# Altium PCB PCB.PcbDoc (part 2 of 2)
Units mm, origin at the board's own origin, x right, y up, seen from the top; angles counter-clockwise.
Board outline 225.9 x 54.5 mm, 2 copper layers (Top Layer, Bottom Layer); 254 components, 305 nets, 976 pads, 364 vias.
Unrouted connection lines stored in the file: 1.
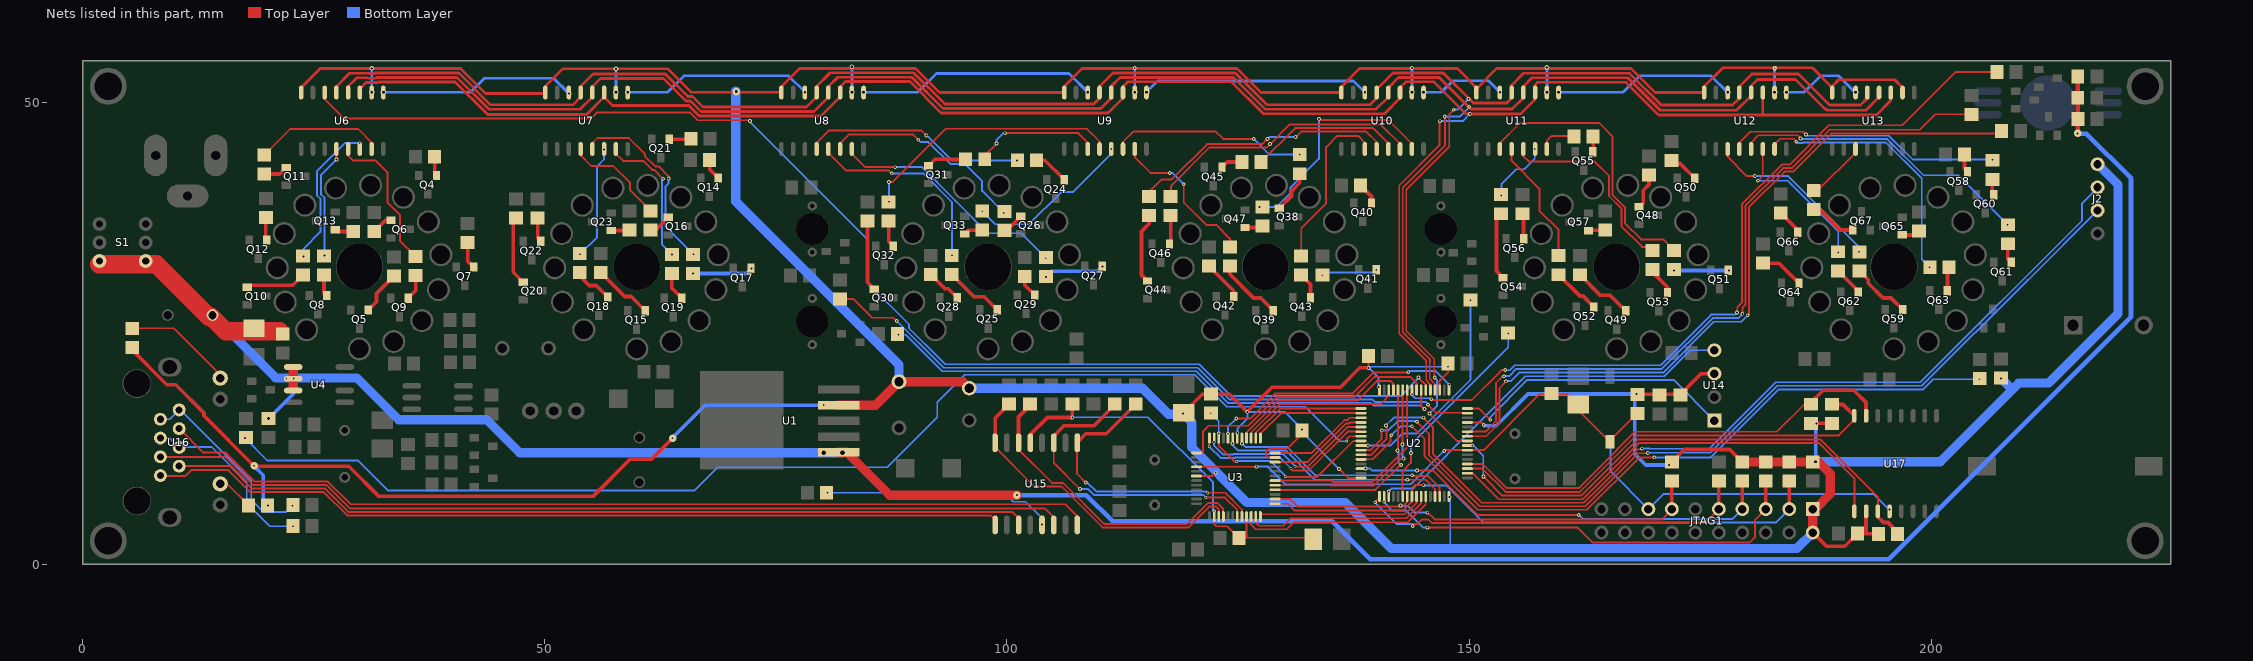
[diagram p2: the nets of this part, all layers, seen from the top]

## Via types
v1: diameter 0.4, hole 0.2, Top Layer to Bottom Layer, 274 vias
v2: diameter 0.5, hole 0.2, Top Layer to Bottom Layer, 23 vias
v3: diameter 0.6, hole 0.3, Top Layer to Bottom Layer, 22 vias
v4: diameter 0.8, hole 0.2, Top Layer to Bottom Layer, 9 vias
v5: diameter 0.5, hole 0.25, Top Layer to Bottom Layer, 9 vias
v6: diameter 0.3, hole 0.2, Top Layer to Bottom Layer, 9 vias
v7: diameter 0.6, hole 0.2, Top Layer to Bottom Layer, 5 vias
v8: diameter 0.6, hole 0.4, Top Layer to Bottom Layer, 3 vias
v9: diameter 0.8, hole 0.4, Top Layer to Bottom Layer, 3 vias
v10: diameter 0.47, hole 0.2, Top Layer to Bottom Layer, 2 vias
v11: diameter 0.8, hole 0.3, Top Layer to Bottom Layer, 2 vias
v12: diameter 0.8, hole 0.5, Top Layer to Bottom Layer, 2 vias
v13: diameter 0.5, hole 0.3, Top Layer to Bottom Layer, 1 vias

## Nets (pads, with @x,y where several pads share a name; then routed paths per layer and width w, separated by ;. In a path a pad name is that pad's centre, name@x,y a point inside that pad or via, vN(x,y) a via of type N, cw(c..) or ccw(c..) an arc to the next point about the centre after c; other vN are vias at no path point) (continued)
NetR51_2: R51.2 U9.3 | length 13.9
  Top Layer w0.2: R51.2@97.594,43.825 97.594,44.244 v1(98.875,45.525) ; v1(99.8,46.65) 107.725,46.65 108.739,45.636 U9.3@108.739,44.941
  Bottom Layer w0.2: v1@98.85,45.55 98.85,45.9 99.6,46.65 v1(99.8,46.65)
NetR52_2: R52.2 U10.3 | length 18.6
  Top Layer w0.2: R52.2@131.825,33.35 131.825,36.375 134.525,39.075 134.525,44.449 134.522,44.452 134.522,45.147 135.722,46.347 137.978,46.347 138.711,45.614 U10.3@138.711,44.941
NetR53_2: R53.2 U11.3 | length 30.9
  Top Layer w0.2: U11.3@153.316,44.941 153.316,45.566 155.497,47.747 164.053,47.747 165.5,46.3 165.5,40.009 166.85,38.659 166.85,36.9 168.6,35.15 170.975,35.15 R53.2@172.225,33.9
NetR54_2: R54.2 U12.3 | length 19.7
  Top Layer w0.2: U12.3@177.954,44.941 177.954,44.096 180.05,42 v1@180.95,42
  Bottom Layer w0.2: v1(180.9,42.025) 184.475,42.025 192.175,34.325 v1(192.175,33.825) ; v1@192.125,33.875 v1@192.175,33.925
NetR55_2: R55.2 U13.3 | length 6.6
  Top Layer w0.2: R55.2@187.275,40.469 187.719,40.469 191.797,44.547 U13.3@191.797,44.941
NetR56_2: R56.2 U6.4 | length 12.4
  Top Layer w0.2: U6.4@27.459,44.941 v1@27.475,43.775
  Bottom Layer w0.2: v1@26.15,33.425 26.15,39.689 25.775,40.064 25.775,42.1 v1@27.5,43.825
  other v1: 26.15,33.4 27.475,43.8
NetR57_2: R57.2 U7.4 | length 11.2
  Top Layer w0.2: U7.4@53.875,44.941 53.875,44.25 55.025,43.1 57.4,43.1 59.225,41.275 59.225,40.469 R57.2@61.45,38.244
NetR58_2: R58.2 U8.4 | length 24.3
  Top Layer w0.2: U8.4@79.402,44.941 79.402,45.627 80.7,46.925 90.75,46.925 v1(91.275,46.4)
  Bottom Layer w0.2: v1(91.275,46.4) 91.314,46.4 94.012,43.703 101.097,43.703 v1(101.1,43.7)
NetR59_2: R59.2 U9.4 | length 28.6
  Top Layer w0.2: v1@87.3,41.375 87.625,41.375 93.378,47.128 108.647,47.128 110.009,45.766 U9.4@110.009,44.941
  Bottom Layer w0.2: v1(87.225,39.225) v1(87.225,41.375)
NetR60_2: R60.2 U10.4 | length 29
  Top Layer w0.2: R60.2@115.375,39.794 115.375,40.3 116.725,41.65 117.825,41.65 121.65,45.475 127.625,45.475 v1(128.175,46.025) ; v1(131.225,46.225) 131.822,46.822 138.853,46.822 139.981,45.694 U10.4@139.981,44.941
  Bottom Layer w0.2: v1(128.175,46.025) 128.375,46.225 v1(131.225,46.225)
NetR61_2: R61.2 U11.4 | length 13.7
  Top Layer w0.2: U11.4@154.586,44.941 154.586,43.664 157.6,40.65 157.6,38.266 159.675,36.191 R61.2@159.675,33.394
NetR62_2: R62.2 U12.4 | length 29.8
  Top Layer w0.2: U12.4@179.224,44.941 179.224,45.624 180.397,46.797 186.103,46.797 v1@186.425,46.475
  Bottom Layer w0.2: v1(186.429,46.501) 186.429,46.446 186.497,46.378 195.401,46.378 197.979,43.8 206.55,43.8 v1@206.6,43.75
  other v1: 206.6,43.775
NetR63_2: R63.2 U6.5 | length 16.1
  Top Layer w0.2: U6.5@28.729,44.941 28.729,44.221 29.272,43.678 31.697,43.678 33,42.375 33,39.125 34.325,37.8 34.325,35.025 R63.2@36.025,33.325
NetR64_2: R64.2 U7.5 | length 20.7
  Top Layer w0.2: U7.5@55.145,44.941 55.145,45.57 55.7,46.125 59.1,46.125 60.825,44.4 60.825,44.175 61.95,43.05 62.325,43.05 63.375,42 v1@63.375,41.775
  Bottom Layer w0.2: v1(63.4,41.75) 63.4,41.25 63.075,40.925 63.075,36.55 v1(66.075,33.55)
NetR65_2: R65.2 U8.5 | length 21.7
  Top Layer w0.2: U8.5@80.672,44.941 80.672,44.528 82.6,42.6 87.225,42.6 v1(87.525,42.3)
  Bottom Layer w0.2: v1(87.525,42.3) 90.925,42.3 94.05,39.175 v1(94.05,33.45)
NetR66_2: R66.2 U9.5 | length 18.2
  Bottom Layer w0.2: v1(97.325,38.2) 98.725,36.8 102.375,36.8 105.85,40.275 107.125,40.275 111.279,44.429 v1(111.279,44.941)
NetR67_2: R67.2 U10.5 | length 16.6
  Top Layer w0.2: R67.2@127.475,43.5 131.175,47.2 139.625,47.2 141.251,45.574 U10.5@141.251,44.941
NetR68_2: R68.2 U11.5 | length 21
  Top Layer w0.2: U11.5@155.856,44.941 155.856,44.169 156.425,43.6 163.55,43.6 165.122,42.028 165.122,39.853 166.472,38.503 166.472,36.578 168.7,34.35 R68.2@169.6,34.35
NetR69_2: R69.2 U12.5 | length 32.8
  Top Layer w0.2: U12.5@180.494,44.941 180.494,45.619 181.294,46.419 185.531,46.419 v1@185.863,46.087
  Bottom Layer w0.2: v1(185.85,46.075) 185.925,46 195.245,46 199.145,42.1 202.925,42.1 v1@208.275,36.75
  other v1: 208.25,36.75
NetR70_2: R70.2 U6.6 | length 16
  Bottom Layer w0.2: v1(23.9,33.325) 23.9,34.15 25.725,35.975 25.725,39.58 25.35,39.955 25.35,42.55 28.375,45.575 v1(29.975,45.575)
NetR71_2: R71.2 U7.6 | length 12.5
  Bottom Layer w0.2: v1@53.75,33.5 55.65,35.4 55.65,43.05 56.4,43.8 v1(56.4,44.9)
  other v1: 53.8,33.55
NetR72_2: R72.2 U8.6 | length 23.5
  Top Layer w0.2: U8.6@81.942,44.358 U8.6@81.942,44.941 81.942,45.567 82.875,46.5 89.85,46.5 v1@90.425,45.925
  Bottom Layer w0.2: v1(90.4,45.925) 90.647,45.678 91.503,45.678 93.855,43.325 95.425,43.325 97.3,41.45 97.3,40.4 v1@99.675,38.025
  other v1: 99.65,38.025
NetR73_2: R73.2 U9.6 | length 21.4
  Top Layer w0.2: U9.6@112.549,44.941 112.549,45.699 113.675,46.825 122.575,46.825 123.375,46.025 v1(126.7,46.025) v1@126.725,46.025
  Bottom Layer w0.2: v1(126.7,46.025) 128.4,44.325 v1(131.675,44.325)
NetR74_2: R74.2 U10.6 | length 30.1
  Top Layer w0.2: R74.2@117.7,39.794 117.75,39.844 117.75,40.95 121.897,45.097 128.097,45.097 128.462,45.462 130.6,47.6 140.4,47.6 142.521,45.479 U10.6@142.521,44.941
  other v1: 128.45,45.475
NetR75_2: R75.2 U11.6 | length 7
  Bottom Layer w0.2: v1(153.475,39.925) 153.5,39.95 153.5,41.175 155.075,42.75 155.975,42.75 157.1,43.875 v1(157.1,44.925)
NetR76_2: R76.2 U12.6 | length 17.5
  Top Layer w0.2: v1@181.25,41.5 181.764,42.014 U12.6@181.764,44.941 U12.6@181.764,45.489
  Bottom Layer w0.2: v1(181.225,41.5) 184.466,41.5 189.925,36.041 v1(189.925,33.75)
NetR77_2: R77.2 U6.7 | length 14.2
  Top Layer w0.2: R77.2@19.95,44.05 19.95,44.6 22.45,47.1 29.8,47.1 31.269,45.631 U6.7@31.269,44.941
NetR78_2: R78.2 U7.7 | length 15.4
  Top Layer w0.2: U7.7@57.685,44.941 57.685,44.44 58.475,43.65 60.63,43.65 61.608,42.672 61.828,42.672 62.775,41.725 v1(62.8,41.725)
  Bottom Layer w0.2: v1(62.8,41.725) 62.697,41.622 62.697,34.603 v1(63.775,33.525)
NetR79_2: R79.2 U8.7 | length 26.3
  Top Layer w0.2: U8.7@83.212,44.941 83.212,44.413 84.625,43 87.925,43 v1(87.9,42.975)
  Bottom Layer w0.2: v1(87.9,42.975) 87.928,43.003 90.756,43.003 94.428,39.331 94.428,39.322 97.925,35.825 101.525,35.825 104.225,33.125 v1(104.2,33.125)
NetR80_2: R80.2 U9.7 | length 16.9
  Top Layer w0.2: U9.7@113.819,44.941 113.819,44.056 115.525,42.35 v1(117.6,42.35) v1@117.625,42.35 ; v1(119.125,41.125) 119.125,39.15 121.55,36.725 122.625,36.725 124.114,35.236 R80.2@124.114,34.335
  Bottom Layer w0.2: v1(117.6,42.35) 117.9,42.35 v1(119.125,41.125)
NetR81_2: R81.2 U10.7 | length 25
  Top Layer w0.2: v1@133.75,48.175 133.85,48.075 141.25,48.075 143.791,45.534 U10.7@143.791,44.941
  Bottom Layer w0.2: v1(127.325,38.65) 129.1,38.65 130.678,40.228 130.678,40.787 133.75,43.859 v1(133.75,48.2)
NetR82_2: R82.2 U11.7 | length 4.1
  Top Layer w0.2: U11.7@158.396,44.941 158.396,45.821 158.925,46.35 R82.2@161.375,46.35
NetR83_2: R83.2 U12.7 | length 28.5
  Top Layer w0.2: U12.7@183.034,44.941 183.034,45.434 183.642,46.042 185.108,46.042 v1@185.4,45.75
  Bottom Layer w0.2: v1(185.375,45.725) 185.503,45.597 186.048,45.597 186.073,45.622 195.088,45.622 198.95,41.761 198.95,33 v1@199.825,32.125
  other v1: 199.8,32.15
NetR90_1: R90.1 U15.13 | length 25
  Bottom Layer w0.2: v10(80.575,7.75) 99.7,7.75 100.675,6.775 102,6.775 103.8,4.975 v10(103.8,4.325)
NetR91_1: R91.1 U16.4 U16.5 | length 19.8
  Bottom Layer w0.2: U16.5@8.414,13.668 9.43,13.668 U16.4@10.446,12.652 10.398,12.7 13.95,12.7 17.75,8.9 17.75,6.625 20.25,4.125 v2(22.75,4.125)
NetR92_1: R92.1 U16.7 U16.8 | length 20.8
  Bottom Layer w0.2: U16.7@8.414,15.7 9.43,15.7 U16.8@10.446,16.716 10.584,16.716 18.25,9.05 18.25,6.975 19.575,5.65 21.975,5.65 v2@22.7,6.375
  other v2: 22.7,6.35
NetR93_1: R93.1 U16.10 | length 4
  Top Layer w0.2: U16.10@14.891,8.715 15.619,8.715 R93.1@17.959,6.375
NetR94_1: R94.1 U16.12 | length 12
  Top Layer w0.2: R94.1@5.375,25.541 9.859,25.541 14.891,20.509 U16.12@14.891,20.145
NetU15_9: U15.9 U16.1 | length 93.4
  Top Layer w0.2: U16.1@8.4,9.575 11.15,9.575 11.775,10.2 15.766,10.2 18.141,7.825 26.075,7.825 28.606,5.294 41.988,5.294 41.991,5.297 98.253,5.297 98.714,4.836 U15.9@98.714,4.222
NetU15_11: U15.11 U16.2 | length 94
  Top Layer w0.2: U16.2@10.4,10.65 15.875,10.65 18.322,8.203 26.231,8.203 28.762,5.672 41.831,5.672 41.834,5.675 100.575,5.675 101.254,4.996 U15.11@101.254,4.222
NetU15_14: U15.14 U16.3 | length 100.8
  Top Layer w0.2: U16.3@8.35,11.6 15.459,11.6 18.479,8.581 26.388,8.581 28.919,6.05 41.675,6.05 ; 41.196,6.053 104.097,6.053 105.064,5.086 U15.14@105.064,4.222
NetU15_16: U15.16 U16.6 | length 102.1
  Top Layer w0.2: U16.6@10.425,14.675 10.5,14.675 13.075,12.1 15.5,12.1 18.642,8.958 26.544,8.958 29.003,6.5 106.325,6.5 107.604,5.221 U15.16@107.604,4.222
NRES_RST#: C8.1 C9.1 JTAG1.15 R9.2 S2.2 U2.7 U3.40 U17.4 | length 92.9
  Top Layer w0.2: U3.40@120.51,10.565 v1@127.035,10.565 ; 147.4,12.45 147.3,12.35 v1(147.3,12.275) 147.384,12.359 U2.7@149.803,12.359 151.559,12.359 157.6,18.4 160.625,18.4 C8.1@161.775,17.25 ; C8.1@161.8,17.3 161.8,16.698 S2.2@165.225,13.273 ; S2.2@165.225,13.356 R9.2@168.2,16.331
  Bottom Layer w0.2: v1(127,10.575) 128.225,10.575 130.125,8.675 143.124,8.675 143.127,8.672 143.523,8.672 143.526,8.675 143.675,8.675 v1@147.275,12.275 ; 165.3,13.25 165.3,10.065 JTAG1.15@169.386,5.979 171.007,7.6 193.75,7.6 v1@195.5,5.85
  other v1: 195.475,5.925
PA1_DO1: R97.1 U2.15 | length 73
  Top Layer w0.2: R97.1@81.95,28.719 83.356,28.719 85.4,26.675 87.7,26.675 v1@88.05,26.325 ; v1@145.538,17.287 146.425,16.4 149.762,16.4 U2.15@149.803,16.359
  Bottom Layer w0.2: v1@88.1,26.325 92.671,21.754 92.68,21.754 93.162,21.272 120.644,21.272 124.094,17.822 139.553,17.822 139.8,17.575 145.325,17.575 145.55,17.35 v1(145.55,17.275)
  other v1: 88.075,26.325
PA2_SHT_DAT: U2.16 U14.1 | length 31
  Top Layer w0.2: U2.16@149.803,16.859 151.066,16.859 v1(152.275,15.65)
  Bottom Layer w0.2: v1(152.275,15.65) 152.275,15.941 156.284,19.95 172.125,19.95 U14.1@176.525,15.55
PA3_CMD#: U2.17 U3.32 | length 28.3
  Top Layer w0.2: v1@124.825,15.775 126.3,15.775 129.025,18.5 137.4,18.5 139.675,20.775 v1@143.375,20.775 ; U2.17@147.803,18.859 v1@147.803,19.497
  Bottom Layer w0.2: v1(123.9,14.125) 123.9,14.875 v1(124.8,15.775) ; v1@143.425,20.825 143.525,20.925 146.339,20.925 147.789,19.475 v1@147.825,19.475
  other v1: 147.852,19.449 143.4,20.8
PA4_ST: U2.20 U6.12 U7.12 U8.12 U9.12 U10.12 U11.12 U12.12 U13.12 | length 226.4
  Top Layer w0.2: U2.20@146.303,18.859 146.303,19.483 145.728,20.058 145.728,21.869 145.769,21.91 145.769,22.14 142.816,25.093 142.816,40.741 147.375,45.3 147.375,48.425 v1@147.4,48.45 ; v1(147.352,48.451) v1@147.399,48.451
  Top Layer w0.3: U6.12@28.729,51.041 28.729,51.698 29.681,52.65 30.782,52.65 30.836,52.597 31.706,52.597 31.708,52.594 31.712,52.594 31.796,52.678 40.502,52.678 43.945,49.235 53.825,49.235 55.145,50.555 U7.12@55.145,51.041 55.145,51.695 56.022,52.572 57.26,52.572 57.263,52.569 62.273,52.569 62.275,52.572 62.832,52.572 65.277,50.128 65.773,50.128 66.906,48.994 79.119,48.994 80.672,50.547 U8.12@80.672,51.041 80.672,51.687 81.688,52.703 89.696,52.703 93.076,49.322 110.147,49.322 111.279,50.454 U9.12@111.279,51.041 111.279,51.729 112.228,52.678 124.496,52.678 127.929,49.244 139.919,49.244 141.251,50.576 U10.12@141.251,51.041 141.251,51.56 142.369,52.678 146.763,52.678 150.166,49.275 154.65,49.275 155.856,50.481 155.856,51.698 156.808,52.65 ; 156.8,52.647 167.151,52.647 170.674,49.125 178.937,49.125 180.494,50.682 U12.12@180.494,51.041 180.494,51.736 181.208,52.45 185.3,52.45 188.475,49.275 188.625,49.275 ; 188.629,49.275 188.781,49.122 192.904,49.122 194.337,50.555 U13.12@194.337,51.041
  Bottom Layer w0.2: v1(147.352,48.451) 148.975,48.45 150,49.475 v1@150,49.525
  other v1: 150,49.5
PA5_SH: U2.21 U6.11 U7.11 U8.11 U9.11 U10.11 U11.11 U12.11 U13.11 | length 225.3
  Top Layer w0.2: U2.21@145.803,18.859 145.803,19.448 145.35,19.902 145.35,22.025 142.438,24.937 142.438,40.988 146.775,45.325 146.775,47.75 v1@146.925,47.9
  Top Layer w0.3: U6.11@29.999,51.441 30.677,52.119 31.508,52.119 31.511,52.117 31.91,52.117 31.966,52.172 40.276,52.172 40.304,52.2 43.829,48.675 54.535,48.675 56.415,50.555 U7.11@56.415,51.041 56.425,51.051 U7.11@56.425,51.7 ; U7.11@56.4,50.575 57.325,49.65 65.575,49.65 66.708,48.517 79.892,48.517 81.942,50.567 U8.11@81.942,51.041 81.942,51.617 82.55,52.225 89.498,52.225 92.878,48.844 110.919,48.844 112.549,50.474 U9.11@112.549,51.041 112.549,51.687 113.062,52.2 ; 113.05,52.2 124.298,52.2 127.748,48.75 140.825,48.75 142.521,50.446 U10.11@142.521,51.041 142.521,51.571 143.15,52.2 146.2,52.2 149.675,48.725 v1(150.075,48.725) 155.55,48.725 157.134,50.309 U11.11@157.134,50.944 ; U11.11@157.126,51.041 157.126,51.872 157.404,52.15 166.973,52.15 170.498,48.625 194.058,48.625 195.607,50.174 U13.11@195.607,51.041 ; 181.725,48.6 181.75,48.625 ; 181.764,48.625 U12.11@181.764,51.041 U12.11@181.764,51.667
  Top Layer w0.4: U6.11@29.999,51.041 U6.11@29.999,51.441
  Bottom Layer w0.2: v1(146.85,47.95) 149.3,47.95 v1(150.075,48.725)
PA6_MO: U2.22 U6.14 | length 138.6
  Top Layer w0.2: U6.14@26.189,51.041 26.189,50.336 28.3,48.225 54.95,48.225 55.6,48.875 65.745,48.875 66.57,48.05 72.124,48.05 v1(72.198,47.976) ; v1(144.525,20.225) 144.525,20.15 144.938,19.737 144.98,19.737 145.303,19.414 U2.22@145.303,18.859
  Bottom Layer w0.2: v1(72.198,47.976) v1@72.2,47.978 ; v1(72.198,47.976) 72.15,47.924 72.15,47.9 84.95,35.1 84.95,30.425 89.4,25.975 89.4,25.559 92.827,22.132 92.837,22.132 93.319,21.65 120.8,21.65 124.25,18.2 142.575,18.2 144.5,20.125 144.5,20.2 v1(144.525,20.225)
PA7_DO2: R98.1 U2.23 | length 62.5
  Top Layer w0.2: U2.23@144.803,18.859 144.803,17.122 145.125,16.8 v1@145.15,16.8
  Bottom Layer w0.2: v1(88.25,24.85) 89.041,24.85 92.514,21.376 92.524,21.376 93.006,20.894 120.487,20.894 123.937,17.444 139.396,17.444 139.666,17.175 144.8,17.175 v1(145.175,16.8)
PA8_DO3: R99.1 U2.41 | length 23.5
  Top Layer w0.2: U2.41@138.303,12.859 v1@139.025,12.85
  Bottom Layer w0.2: v1(139.039,12.862) 139.012,12.862 139,12.85 141.475,12.85 142.775,14.15 144.3,14.15 150.15,20 v1(150.15,28.575)
PA9_TXD: J2.3 U2.42 | length 100.2
  Top Layer w0.2: U2.42@138.303,12.359 139.309,12.359 140.525,13.575 140.525,14.4 v1@140.625,14.5 ; v1(144.35,15.425) 145.652,14.123 145.652,11.803 151.166,6.289 162.573,6.289 168.309,12.025 v1@169.35,12.025
  Bottom Layer w0.2: v1(140.55,14.5) 141.25,14.5 142.25,15.5 144.275,15.5 v1(144.35,15.425) v1@144.375,15.425 ; v1(169.325,12.05) 169.25,12.075 176.1,12.075 183.347,19.322 198.972,19.322 210.4,30.75 210.45,30.75 J2.3@218,38.3
PA10_RXD: J2.2 U2.43 | length 103.1
  Top Layer w0.2: U2.43@138.303,11.859 138.333,11.829 139.349,11.829 141.05,13.53 141.05,14.9 v1@140.975,14.975 ; v1(145.05,15.875) 146.075,14.85 146.075,11.953 151.361,6.667 162.417,6.667 164.225,8.475 168.2,12.45 v1@168.675,12.45
  Bottom Layer w0.2: v1(141,15.025) 141.878,15.903 145.022,15.903 v1(145.05,15.875) ; v1(168.678,12.524) 168.678,12.478 168.728,12.528 169.523,12.528 169.548,12.502 175.952,12.502 183.158,19.708 198.808,19.708 216.3,37.2 216.3,39.05 217.975,40.725 J2.2@217.975,40.775
PA11_BEEZ: R89.2 U2.44 | length 79.3
  Top Layer w0.2: U2.44@138.3,11.375 139.55,11.375 141.5,13.325 v1@141.5,13.925 ; v1(143.8,14.95) 145.183,13.567 145.183,11.677 150.948,5.911 162.736,5.911 168.375,11.55 169.9,11.55 169.925,11.525 v1@169.975,11.575
  Bottom Layer w0.2: v1@141.575,13.95 142.575,14.95 v1(143.8,14.95) ; v1(170.025,11.575) 176.15,11.575 183.5,18.925 199.125,18.925 200.225,20.025 v1(205.175,20.025)
  other v1: 141.576,13.963
PA13_JTMS: JTAG1.7 R102.2 U2.46 | length 46.5
  Top Layer w0.2: v1(144.35,10.15) 146.125,10.15 150.95,5.325 v1@161.875,5.325
  Top Layer w0.4: JTAG1.7@179.546,5.979 R102.2@179.546,8.999
  Bottom Layer w0.2: v1(138.775,10.375) 139.275,10.375 139.475,10.175 144.3,10.175 v1@144.35,10.125 ; v1(161.85,5.35) 162.272,4.928 178.495,4.928 JTAG1.7@179.546,5.979
PA14_JTCK: JTAG1.9 R110.2 U2.49 | length 43.3
  Top Layer w0.2: v1(139.825,6.725) 140.303,7.203 U2.49@140.303,7.359 ; v1(143.887,4.158) 143.887,4.238 143.75,4.375 144.4,4.375 144.875,4.85 145.6,4.85 145.956,4.494 175.521,4.494 JTAG1.9@177.006,5.979
  Top Layer w0.4: JTAG1.9@177.006,5.979 R110.2@177.006,8.999
  Bottom Layer w0.2: v1(139.825,6.725) 139.825,6.675 142.125,4.375 143.775,4.375
PA15_JTDI: JTAG1.5 R103.2 U2.50 | length 48.8
  Top Layer w0.2: v1(145.5,3.975) 161.75,3.975 163.375,2.35 180.325,2.35 180.9,2.925 180.9,4.793 JTAG1.5@182.086,5.979
  Top Layer w0.4: JTAG1.5@182.086,5.979 R103.2@182.086,8.999
  Bottom Layer w0.2: v1(140.8,6.775) 140.8,6.725 141.7,5.825 143.175,5.825 145.025,3.975 v1(145.5,3.975)
PB_SD0: U2.26 U3.18 | length 22
  Top Layer w0.2: U3.18@129.01,9.065 135.132,9.065 135.297,8.9 139.501,8.9 143.291,12.69 U2.26@143.291,18.813
PB_SD1: U2.27 U3.17 | length 22.6
  Top Layer w0.2: U3.17@129.01,8.565 134.997,8.565 135.04,8.522 139.672,8.522 142.6,11.45 v1@142.9,11.45 ; v1(142.783,12.971) 142.803,12.951 U2.27@142.803,18.859
  Bottom Layer w0.2: v1(142.783,12.971) 142.783,11.574 v1(142.91,11.447)
PB_SD2: U2.28 U3.16 | length 23.1
  Top Layer w0.2: U3.16@129.01,8.065 139.862,8.065 142.572,10.775 v1@142.675,10.775 ; v1@142.303,12.336 U2.28@142.303,18.859
  Bottom Layer w0.2: v1@142.148,12.336 142.35,12.134 142.35,11.025 v1@142.625,10.75
  other v1: 142.65,10.75 142.25,12.325
PB_SD3: JTAG1.13 R101.1 U2.55 U3.14 | length 49
  Top Layer w0.2: U3.14@129.01,7.065 130.655,7.065 131.473,6.247 142.75,6.247 143.303,6.8 U2.55@143.303,7.359 ; v1@145.475,5.65 146.253,4.872 170.897,4.872 171.926,5.901 JTAG1.13@171.926,5.979
  Top Layer w0.4: JTAG1.13@171.926,5.979 R101.1@171.926,9.027
  Bottom Layer w0.2: v1@142.55,6.325 143.375,6.325 144.075,5.625 145.5,5.625 v1@145.5,5.65
  other v1: 145.475,5.6 142.575,6.375
PB_SD4: JTAG1.3 R104.1 U2.56 U3.13 | length 63.2
  Top Layer w0.2: U3.13@129.01,6.565 130.356,6.565 131.086,5.835 142.886,5.835 143.803,6.752 U2.56@143.803,7.359 143.803,8.253 144.125,8.575 v1@144.975,8.575
  Top Layer w0.4: JTAG1.3@184.626,5.979 R104.1@184.626,9.027
  Bottom Layer w0.2: v1@145.05,8.55 147.525,8.55 151.525,4.55 183.197,4.55 JTAG1.3@184.626,5.979
  other v1: 145.075,8.575
PB_SD5: U2.57 U3.12 | length 18.4
  Top Layer w0.2: U3.12@127.41,5.165 127.41,5.428 143.049,5.428 144.303,6.683 U2.57@144.303,7.359
PB_SD6: U2.58 U3.11 | length 20.4
  Top Layer w0.2: U3.11@126.91,5.165 126.91,4.498 127.234,4.175 129.883,4.175 130.705,4.997 143.176,4.997 144.803,6.624 U2.58@144.803,7.359
PB_SD7: U2.59 U3.10 | length 21.9
  Top Layer w0.2: U3.10@126.41,5.165 126.41,4.287 126.9,3.797 130.242,3.797 131.01,4.565 143.354,4.565 145.303,6.514 U2.59@145.303,7.359
PB_SD8: U2.61 U3.31 | length 24.9
  Top Layer w0.2: v1@143.275,9.175 143.3,9.15 145.296,9.15 146.303,8.143 U2.61@146.303,7.359
  Bottom Layer w0.2: v1@124.425,13.05 124.425,12.875 124.967,12.333 130.132,12.333 133.316,9.15 v1(143.325,9.15)
  other v1: 124.4,13.075
PB_SD9: U2.62 U3.29 | length 24.3
  Top Layer w0.2: v1@143.825,9.575 145.525,9.575 146.8,8.3 146.8,7.362 U2.62@146.803,7.359
  Bottom Layer w0.2: v1@125.4,13.1 125.789,12.711 130.289,12.711 133.35,9.65 v1(143.825,9.65)
  other v1: 125.425,13.075
PB_SD10: U2.29 U3.28 | length 19.3
  Top Layer w0.2: U3.28@125.925,13.925 125.925,14.303 129.347,17.725 137.875,17.725 139.979,19.829 141.496,19.829 141.803,19.522 U2.29@141.803,18.859
PB_SD11: U2.30 U3.27 | length 17.6
  Top Layer w0.2: U3.27@126.425,13.775 126.425,14.269 129.504,17.347 140.428,17.347 141.303,18.222 U2.30@141.303,18.859
PB_SD12: U2.33 U3.26 | length 12.8
  Top Layer w0.2: U3.26@126.925,13.9 126.925,14.235 129.55,16.859 U2.33@138.303,16.859
PB_SD13: U2.34 U3.25 | length 12.3
  Top Layer w0.2: U3.25@127.41,13.665 127.41,14.11 129.659,16.359 U2.34@138.303,16.359
PB_SD14: U2.35 U3.24 | length 10.9
  Top Layer w0.2: U3.24@129.01,12.065 132.962,12.065 136.512,15.615 136.8,15.615 137.045,15.859 U2.35@138.303,15.859
PB_SD15: U2.36 U3.22 | length 11.1
  Top Layer w0.2: U3.22@129.01,11.065 132.496,11.065 136.668,15.237 136.957,15.237 137.079,15.359 U2.36@138.303,15.359
PC0_CLK_INT: R107.1 U2.8 U17.3 | length 58
  Top Layer w0.2: v1@151.5,9.325 151.725,9.325 153.6,7.45 162.131,7.45 168.181,13.5 188.009,13.5 194.207,7.302 U17.3@194.207,5.739
  Top Layer w0.4: U17.3@194.207,5.739 194.207,5.143 194.825,4.525 195.3,4.525 196.316,3.509 R107.1@196.316,3.3
  Bottom Layer w0.2: v1(150.325,12.875) 150.425,12.875 151.525,11.775 151.525,9.325 151.55,9.35 v1(151.55,9.5)
PC1_OE: U2.9 U6.13 U7.13 U8.13 U9.13 U10.13 U11.13 U12.13 U13.13 | length 234.5
  Top Layer w0.2: v1@145.725,16.3 148.666,13.359 U2.9@149.803,13.359 ; v1(146.277,20.224) 146.227,20.224 146.225,20.226 146.225,22.219 143.194,25.25 143.194,40.519 147.85,45.175 147.85,48.675 v1@148.35,49.175
  Top Layer w0.3: U6.13@27.459,51.041 27.459,51.698 28.889,53.128 30.98,53.128 31.033,53.074 31.517,53.074 31.598,53.156 40.7,53.156 44.142,49.713 53.033,49.713 53.875,50.555 U7.13@53.875,51.041 53.875,51.698 55.227,53.05 57.458,53.05 57.461,53.047 62.075,53.047 62.077,53.05 63.03,53.05 65.475,50.606 65.971,50.606 67.104,49.472 78.319,49.472 79.402,50.555 U8.13@79.402,51.041 79.402,51.698 80.885,53.181 89.894,53.181 93.274,49.8 109.381,49.8 110.009,50.428 U9.13@110.009,51.041 110.009,51.698 111.467,53.156 124.694,53.156 128.127,49.722 139.275,49.722 139.981,50.428 U10.13@139.981,51.041 139.981,51.375 141.762,53.156 147.194,53.156 150.45,49.9 154.058,49.9 154.586,50.428 U11.13@154.586,51.041 154.586,51.825 155.889,53.128 158.7,53.128 ; 158.692,53.125 167.349,53.125 170.772,49.702 178.498,49.702 179.224,50.428 U12.13@179.224,51.041 179.224,51.698 180.576,53.05 185.635,53.05 188.985,49.7 192.339,49.7 193.067,50.428 U13.13@193.067,51.041
  Bottom Layer w0.2: v1(145.7,16.325) 146.525,17.15 146.525,19.9 v1@146.238,20.188 ; v1(148.325,49.175) 148.325,49.2 148.775,49.2 149.9,50.325 v1@149.925,50.325
  other v1: 149.925,50.35
PC2_LEDR: R5.2 U2.10 | length 80.2
  Top Layer w0.2: U2.10@149.803,13.859 151.818,13.859 153.278,15.319 153.278,19.078 153.975,19.775 v1(153.975,19.8) ; v1(180.125,26.95) 180.256,27.081 180.256,38.637 184.119,42.5 185.05,42.5 189.15,46.6 ; 189.165,46.6 R5.2@207.5,46.6
  Bottom Layer w0.2: v1@153.95,19.825 154.5,19.825 155.425,20.75 170.969,20.75 176.469,26.25 179.425,26.25 v1(180.125,26.95)
PC3_LEDG: R6.2 U2.11 | length 77.9
  Top Layer w0.2: U2.11@149.803,14.359 151.784,14.359 152.9,15.475 152.9,19.625 153.625,20.35 v1(153.775,20.35) ; v1(179.55,27.1) 179.55,27.75 179.878,28.078 179.878,38.794 183.962,42.878 184.878,42.878 189.025,47.025 ; 189.045,47.025 198.75,47.025 200.425,48.7 R6.2@204.4,48.7
  Bottom Layer w0.2: v1@153.775,20.375 154.325,20.375 155.102,21.152 170.837,21.152 176.331,26.647 179.122,26.647 v1@179.575,27.1
PC4_CS#: U2.24 U3.37 | length 29.5
  Top Layer w0.2: U3.37@120.51,12.065 121.049,12.065 121.193,12.209 121.193,14.368 121.825,15 126.078,15 129.181,18.103 137.553,18.103 139.723,20.273 143.6,20.273 ; 143.604,20.278 144.303,19.579 U2.24@144.303,18.859
PC5_LEDB: R7.2 U2.25 | length 84.8
  Top Layer w0.2: v1(145.9,17.875) 146,17.775 150.25,17.775 153.5,21.025 v1(153.9,21.025) ; v1@179,27.25 179,27.8 179.5,28.3 179.5,38.95 183.806,43.256 184.656,43.256 188.9,47.5 196.844,47.5 202.619,53.275 R7.2@207.1,53.275
  Bottom Layer w0.2: v1(143.8,18.4) 143.8,18.35 144.175,17.975 145.8,17.975 v1(145.9,17.875) ; v1@153.9,21 154.392,21 154.942,21.55 170.7,21.55 176.175,27.025 178.775,27.025 v1@178.987,27.237
  other v1: 178.975,27.25
PC6_IOR#: U2.37 U3.35 | length 19.1
  Top Layer w0.2: U3.35@122.41,13.665 U3.35@122.425,13.65 ; v6@131.175,10.558 132.524,10.558 136.825,14.859 U2.37@138.303,14.859
  Bottom Layer w0.2: v6(122.375,13.25) 122.375,12.875 123.35,11.9 124.481,11.9 124.537,11.956 129.844,11.956 v6(131.175,10.625)
PC7_IOW#: U2.38 U3.36 | length 20.2
  Top Layer w0.2: v6(121.875,12.75) 121.875,13.63 U3.36@121.91,13.665 ; v6@130.725,10.325 130.892,10.158 132.658,10.158 136.859,14.359 U2.38@138.303,14.359
  Bottom Layer w0.2: v6(121.875,12.75) 123.103,11.522 124.638,11.522 124.694,11.578 129.522,11.578 v6(130.725,10.375)
PC8_HV: R18.1 U2.39 | length 132.7
  Top Layer w0.2: v6@136.775,13.3 136.775,13.57 137.064,13.859 U2.39@138.303,13.859
  Bottom Layer w0.2: v1@17.525,13.7 20,11.225 29.8,11.225 33.045,7.98 66.18,7.98 68.443,10.243 68.449,10.243 68.714,10.508 87.058,10.508 92.45,15.9 92.45,17.55 95.417,20.517 120.331,20.517 123.797,17.05 132.25,17.05 135.975,13.325 v6(136.75,13.325)
  other v1: 17.575,13.675
PC9_INT#: R8.2 U2.40 U3.34 | length 21.8
  Top Layer w0.2: U3.34@122.9,13.6 122.9,12.85 124.625,11.125 v6(124.85,11.125) v6@124.875,11.1 ; v6@130.125,9.458 133.583,9.458 137.484,13.359 U2.40@138.303,13.359
  Bottom Layer w0.2: v1(122.05,16.35) 122.9,15.5 v1(122.9,14.175) ; v6@124.85,11.2 128.475,11.2 130.1,9.575 v6(130.1,9.5)
PC10_SHT_SCK: U2.51 U14.4 | length 41.6
  Bottom Layer w0.2: v1(141.3,7.9) 141.625,8.225 143.973,8.225 147.627,11.879 147.627,11.902 156.075,20.35 171.103,20.35 173.923,23.17 U14.4@176.525,23.17
PC13_CLOCK: U2.2 U17.1 | length 51.2
  Top Layer w0.2: U2.2@149.803,9.859 U2.2@150.319,9.859 ; U2.2@149.825,9.85 150.4,9.85 153.196,7.054 162.27,7.054 168.338,13.122 187.853,13.122 191.675,9.3 U17.1@191.675,5.75
PC14_SCL: R105.1 U2.3 U17.16 | length 49.4
  Top Layer w0.2: U2.3@149.803,10.359 151.416,10.359 153.934,7.841 161.989,7.841 168.097,13.95 190,13.95 191.675,15.625 U17.16@191.675,16.025
  Top Layer w0.4: R105.1@189.3,17.3 190.446,17.3 U17.16@191.667,16.079
PC15_SDA: R106.1 U2.4 U17.15 | length 50.8
  Top Layer w0.2: U2.4@149.803,10.859 151.466,10.859 154.078,8.247 159.599,8.247 ; 159.6,8.248 160.028,8.248 ; 160.029,8.247 161.842,8.247 166.003,12.408 166.003,12.453 167.9,14.35 183.275,14.35 186.325,17.4 R106.1@187.05,17.4
  Top Layer w0.4: R106.1@186.875,17.425 188.293,18.843 191.602,18.843 192.937,17.508 U17.15@192.937,16.079
PD2_DO4: R100.1 U2.54 | length 22.3
  Top Layer w0.2: U2.54@142.803,7.359 142.803,10.078 143.7,10.975 v1(143.7,12.05)
  Bottom Layer w0.2: v1@143.7,12.1 143.7,12.95 154.225,23.475 v1(154.225,24.975)
RX+: R109.2 U3.3 U15.8 | length 35.7
  Top Layer w0.2: U15.8@98.714,13.112 98.714,12.661 102.95,8.425 105.905,8.425 110.33,4 119.65,4 121.925,6.275 122.6,6.275 122.91,5.965 U3.3@122.91,5.165
  Top Layer w0.4: U15.8@98.714,13.112 U15.8@98.714,13.885 ; U15.8@98.725,13.2 98.725,15.85 100.225,17.35 R109.2@100.225,17.425
RX-: R108.2 U3.4 U15.6 | length 33.4
  Top Layer w0.2: U15.6@101.254,13.112 101.254,12.421 104.872,8.803 106.062,8.803 110.487,4.378 119.494,4.378 121.769,6.653 122.756,6.653 123.375,6.034 U3.4@123.375,5.2
  Top Layer w0.4: U15.6@101.254,13.112 U15.6@101.254,13.162 101.254,15.954 102.5,17.2 R108.2@102.5,17.3 ; R108.2@102.5,16.866 R108.2@102.5,17.346
S0: Q4.1 R24.1 | length 2.1
  Top Layer w0.4: R24.1@38.091,44.1 38.091,42.267 Q4.1@38.283,42.075
S1: Q5.1 R32.1 | length 4.8
  Top Layer w0.4: Q5.1@30.908,27.525 31.8,28.417 31.8,29.309 R32.1@33.7,31.209
S2: Q6.1 R40.1 | length 2.3
  Top Layer w0.4: R40.1@31.55,36.009 32.749,37.208 Q6.1@33.375,37.208
S3: Q7.1 R48.1 | length 2.9
  Top Layer w0.4: R48.1@41.65,34.809 41.65,32.833 Q7.1@42.308,32.175
S4: Q8.1 R56.1 | length 2.4
  Top Layer w0.4: R56.1@26.125,31.309 26.125,29.358 Q8.1@26.408,29.075
S5: Q9.1 R63.1 | length 2.8
  Top Layer w0.4: Q9.1@35.233,28.8 36.025,29.592 R63.1@36.025,31.234
S6: Q10.1 R70.1 | length 6.6
  Top Layer w0.4: Q10.1@17.825,29.983 18.042,30.2 22.741,30.2 R70.1@23.85,31.309
S7: Q11.1 R77.1 | length 2.7
  Top Layer w0.4: R77.1@19.65,42.234 21.326,42.234 Q11.1@22.025,42.933
S8: Q12.1 R25.1 | length 2.5
  Top Layer w0.4: R25.1@19.825,37.509 19.825,35.208 Q12.1@19.933,35.1
S9: Q13.1 R33.1 | length 2
  Top Layer w0.4: Q13.1@27.325,36.217 27.533,36.009 R33.1@29.275,36.009
S10: Q14.1 R41.1 | length 2.3
  Top Layer w0.4: R41.1@67.841,43.75 67.841,42.717 Q14.1@68.758,41.8
S11: Q15.1 R49.1 | length 6.5
  Top Layer w0.4: R49.1@56.05,31.584 58.659,28.975 59.35,28.975 Q15.1@60.876,27.449
S12: Q16.1 R57.1 | length 2.5
  Top Layer w0.4: R57.1@61.45,36.184 62.001,36.184 Q16.1@63.35,37.533
S13: Q17.1 R64.1 | length 6.6
  Bottom Layer w0.4: v1(66.05,31.475) 71.825,31.475 v1(72.375,32.025)
S14: Q18.1 R71.1 | length 4.3
  Top Layer w0.4: R71.1@53.775,31.559 53.775,31.2 54.8,30.175 55.558,30.175 Q18.1@56.808,28.925
S15: Q19.1 R78.1 | length 3.1
  Top Layer w0.4: R78.1@63.75,31.459 63.75,29.883 Q19.1@64.833,28.8
S16: Q20.1 R26.1 | length 7.5
  Top Layer w0.4: R26.1@46.9,37.459 46.6,37.159 46.6,31.608 Q20.1@47.675,30.533
S17: Q21.1 R34.1 | length 2.3
  Top Layer w0.4: Q21.1@63.483,46 65.759,46 R34.1@65.809,46.05
S18: Q22.1 R42.1 | length 2.6
  Top Layer w0.4: R42.1@49.225,37.459 49.225,35.283 Q22.1@49.558,34.95
S19: Q23.1 R50.1 | length 2
  Top Layer w0.4: Q23.1@57.2,36.117 59.083,36.117 R50.1@59.15,36.184
S20: Q24.1 R58.1 | length 3.9
  Top Layer w0.4: R58.1@103.191,43.725 104.083,43.725 Q24.1@106.208,41.6
S21: Q25.1 R65.1 | length 6.5
  Top Layer w0.4: R65.1@94.025,31.359 96.434,28.95 97.533,28.95 Q25.1@98.933,27.55
S22: Q26.1 R72.1 | length 2.4
  Top Layer w0.4: R72.1@99.725,36.109 99.951,36.109 Q26.1@101.5,37.658
S23: Q27.1 R79.1 | length 6.6
  Bottom Layer w0.4: v1(104.225,31.1) 104.825,31.7 109.8,31.7 v1(110.325,32.225)
S24: Q28.1 R27.1 | length 3.9
  Top Layer w0.4: R27.1@91.75,31.359 93.284,29.825 93.658,29.825 Q28.1@94.633,28.85
S25: Q29.1 R35.1 | length 2.5
  Top Layer w0.4: R35.1@101.925,31.159 101.925,30.233 Q29.1@103.008,29.15
S26: Q30.1 R43.1 | length 7.7
  Top Layer w0.4: R43.1@84.9,37.159 84.9,30.533 Q30.1@85.65,29.783
S27: Q31.1 R51.1 | length 4.3
  Top Layer w0.4: Q31.1@91.5,43.108 92.217,43.825 R51.1@95.534,43.825
S28: Q32.1 R59.1 | length 2.9
  Top Layer w0.4: R59.1@87.2,37.159 87.2,34.908 Q32.1@87.683,34.425
S29: Q33.1 R66.1 | length 2.1
  Top Layer w0.4: Q33.1@95.425,35.742 95.842,36.159 R66.1@97.325,36.159
S30: Q38.1 R73.1 | length 4.6
  Top Layer w0.4: Q38.1@129.45,38.533 130.778,39.861 130.778,40.378 131.675,41.275 R73.1@131.675,42.259
S31: Q39.1 R80.1 | length 7.2
  Top Layer w0.4: R80.1@124.114,32.275 124.114,31.386 126.675,28.825 127.445,28.825 Q39.1@128.821,27.449
S32: Q40.1 R28.1 | length 2.4
  Top Layer w0.4: R28.1@138.241,41 139.433,39.808 Q40.1@139.433,39.1
S33: Q41.1 R36.1 | length 6.1
  Bottom Layer w0.2: v1(134.1,31.275) 134.4,31.575 139.675,31.575 v1(139.95,31.85)
S34: Q42.1 R44.1 | length 4.4
  Top Layer w0.4: R44.1@121.85,32.259 124.533,29.576 Q42.1@124.533,28.975
S35: Q43.1 R52.1 | length 2.9
  Top Layer w0.4: R52.1@131.825,31.309 132.833,30.301 Q43.1@132.833,28.85
S36: Q44.1 R60.1 | length 7.7
  Top Layer w0.4: Q44.1@115.2,30.658 114.55,31.308 114.55,36.025 115.375,36.85 R60.1@115.375,37.734
S37: Q45.1 R67.1 | length 2.4
  Top Layer w0.4: Q45.1@123.258,42.95 123.833,43.525 R67.1@125.434,43.525
S38: Q46.1 R74.1 | length 3.1
  Top Layer w0.4: Q46.1@117.583,34.65 117.7,34.767 R74.1@117.7,37.734
S39: Q47.1 R81.1 | length 1.9
  Top Layer w0.4: Q47.1@125.75,36.442 127.458,36.442 R81.1@127.625,36.609
S40: Q48.1 R29.1 | length 3.9
  Top Layer w0.4: Q48.1@168.375,38.708 168.825,39.158 168.825,40.475 169.45,41.1 R29.1@169.45,42.134
S41: Q49.1 R37.1 | length 6.6
  Top Layer w0.4: R37.1@161.975,31.334 164.209,29.1 165.27,29.1 Q49.1@166.921,27.449
S42: Q50.1 R45.1 | length 3.3
  Top Layer w0.4: R45.1@171.9,43.709 172.234,43.375 172.808,43.375 Q50.1@174.408,41.775
S43: Q51.1 R53.1 | length 5.9
  Bottom Layer w0.4: v1(172.15,31.8) v1@178.075,31.8
  other v1: 178.1,31.775
S44: Q52.1 R61.1 | length 5.3
  Top Layer w0.4: R61.1@159.675,31.334 161.984,29.025 162.308,29.025 Q52.1@163.483,27.85
S45: Q53.1 R68.1 | length 3.1
  Top Layer w0.4: R68.1@169.825,31.884 169.825,31.625 171.458,29.992 Q53.1@171.458,29.425
S46: Q54.1 R75.1 | length 7.4
  Top Layer w0.4: R75.1@153.45,37.934 152.95,37.434 152.95,31.75 Q54.1@153.638,31.062
S47: Q55.1 R82.1 | length 1.7
  Top Layer w0.4: Q55.1@163.358,44.65 163.416,44.708 R82.1@163.416,46.3
S48: Q56.1 R30.1 | length 2.8
  Top Layer w0.4: R30.1@155.75,37.934 155.883,37.801 Q56.1@155.883,35.225
S49: Q57.1 R38.1 | length 1.9
  Top Layer w0.4: Q57.1@162.9,36.092 162.967,36.159 R38.1@164.725,36.159
S50: Q58.1 R46.1 | length 2
  Top Layer w0.4: R46.1@203.591,44.35 203.591,42.792 Q58.1@203.908,42.475
S51: Q59.1 R54.1 | length 6.6
  Top Layer w0.4: R54.1@192.225,31.734 193.175,30.784 193.175,30.425 194.775,28.825 195.644,28.825 Q59.1@196.893,27.576
S52: Q60.1 R62.1 | length 1.7
  Top Layer w0.4: R62.1@206.6,41.659 206.6,40.158 Q60.1@206.758,40
S53: Q61.1 R69.1 | length 2.2
  Top Layer w0.4: R69.1@208.275,34.684 208.275,33.033 Q61.1@208.633,32.675
S54: Q62.1 R76.1 | length 3.2
  Top Layer w0.4: R76.1@189.9,31.759 192.108,29.551 Q62.1@192.108,29.475
S55: Q63.1 R83.1 | length 2.6
  Top Layer w0.4: Q63.1@201.733,29.6 201.733,31.992 R83.1@201.891,32.15
S56: Q64.1 R31.1 | length 4.8
  Top Layer w0.4: R31.1@181.775,32.584 183.524,32.584 Q64.1@185.683,30.425
S57: Q65.1 R39.1 | length 2
  Top Layer w0.4: Q65.1@196.85,35.642 198.258,35.642 R39.1@198.675,36.059
S58: Q66.1 R47.1 | length 2.8
  Top Layer w0.4: R47.1@183.7,38.009 185.533,36.176 Q66.1@185.533,35.925
S59: Q67.1 R55.1 | length 5.1
  Top Layer w0.4: R55.1@187.275,38.409 187.891,38.409 190.125,36.175 Q67.1@191.492,36.175
SOC_A: U6.9 U7.14 | length 21.3
  Bottom Layer w0.3: v3(32.547,51.071) 41.945,51.071 43.469,52.595 50.955,52.595 52.479,51.071 v5@52.613,51.071
  other v5: 52.613,50.944
SOC_B: U7.9 U8.14 | length 20.7
  Bottom Layer w0.3: v3(58.963,51.071) 63.281,51.071 65.059,52.849 76.376,52.849 78.14,51.085 v5(78.14,51.071)
SOC_C: U8.9 U9.14 | length 26.1
  Bottom Layer w0.3: v3(84.49,51.071) 90.332,51.071 92.364,53.103 106.706,53.103 108.738,51.071 v5(108.747,51.071) v5@108.747,50.944
SOC_D: U9.9 U10.14 | length 24.8
  Bottom Layer w0.3: v3(115.097,51.071) 115.097,51.097 116.3,52.3 137.475,52.3 138.719,51.056 v5@138.719,50.944
  other v5: 138.719,51.071
SOC_E: U10.9 U11.14 | length 9.3
  Bottom Layer w0.3: v3(145.069,51.071) 146.974,51.071 148.228,52.325 152.075,52.325 153.324,51.076 v5(153.324,51.071)
SOC_F: U11.9 U12.14 | length 19.8
  Bottom Layer w0.3: v3(159.674,51.071) 166.659,51.071 168.437,52.849 176.176,52.849 177.954,51.071 v3(177.962,51.071)
SOC_G: U12.9 U13.14 | length 9
  Bottom Layer w0.3: v3(184.312,51.071) 186.217,51.071 187.995,52.849 189.976,52.849 191.754,51.071 v3(191.805,51.071)
TX+: R96.2 U3.7 U15.3 | length 33.1
  Top Layer w0.2: U15.3@105.064,13.162 105.064,10.986 v1(107.9,8.15) ; v6@121.55,7.225 123.575,7.225 124.91,5.89 U3.7@124.91,5.165
  Top Layer w0.4: U15.3@105.025,13.85 106.175,15 109.4,15 R96.2@111.775,17.375
  Bottom Layer w0.2: v1(107.9,8.15) 108.775,8.15 109.403,7.522 121.253,7.522 121.475,7.3 121.475,7.225 v6(121.5,7.225)
TX-: R95.2 U3.8 U15.1 | length 31.8
  Top Layer w0.2: U15.1@107.575,13.2 107.575,9.8 v1(108.525,8.85) ; v6@121.725,7.675 121.8,7.75 123.6,7.75 125.41,5.94 U3.8@125.41,5.165
  Top Layer w0.4: U15.1@107.575,13.175 108.525,14.125 110.725,14.125 R95.2@113.925,17.325 ; R95.2@114.275,17.65 R95.2@114.275,17.725
  Bottom Layer w0.2: v1@108.55,8.85 108.7,8.85 109.65,7.9 121.55,7.9 v6(121.725,7.725)
VCC_12: C2.1 C16.1 C17.1 R1.1 R2.2 R3.1 R21.1 S1.3 S1.4 U1.1 U4.1 U4.2 U4.3 | length 289.3
  Top Layer w0.4: U4.2@22.557,20.305 U4.2@22.779,20.083
  Top Layer w0.5: v4(215.825,46.625) 215.825,52.766 R3.1@215.834,52.775
  Top Layer w1: U4.3@22.779,18.975 U4.2@22.779,20.083 U4.1@22.779,21.2 ; U1.1@81.783,12.123 82.677,12.123 87.325,7.475 v4@101.15,7.475
  Top Layer w2: S1.3@1.8,32.45 7.991,32.45 13.63,26.811 13.889,26.811 15.5,25.2 C17.1@21.3,25.2
  Bottom Layer w0.4: v13(20.125,15.775) 22.85,18.5 v2(22.85,20.125)
  Bottom Layer w0.5: v4(101.075,7.5) 108.579,7.5 111.429,4.65 135.2,4.65 139.275,0.575 195.375,0.575 221.6,26.8 221.6,41.775 216.775,46.6 v4@215.825,46.6
  Bottom Layer w1: C2.1@14.075,27 20.9,20.175 29.661,20.175 34.198,15.638 43.723,15.638 47.279,12.082 v12(80.172,12.082) v12(82.204,12.082)
  other v2: 22.025,20.075
VCC_25: C5.1 C6.1 C27.2 U3.2 U3.9 U15.5 | length 43.1
  Top Layer w0.2: U3.2@122.41,5.165 122.41,4.365 122.65,4.125 123.841,4.125 C6.1@125.091,2.875 133,2.875 C5.1@133.15,2.725 ; 125.91,2.89 U3.9@125.91,5.165
  Top Layer w0.4: U15.5@102.55,13.2 102.55,14.075 104.375,15.9 v1(107.075,15.9) ; v1@107.072,15.95 C27.2@107.072,17.3
  Bottom Layer w0.2: 107.275,15.925 115.25,15.925 122.3,8.875 122.3,5.875 v1(122.425,5.75)
VCC_33: C1.1 C3.1 C12.1 C13.1 C14.1 C15.1 C28.2 C31.2 J2.1 JTAG1.1 JTAG1.2 L1.2 R4.1 R8.1 R9.1 R84.1 R93.2 R94.2 R101.2 R102.1 R103.1 R104.2 R105.2 R106.2 R107.2 U1.4 U2.13 U2.19 U2.32 U2.48 U2.64 U3.23 U3.30 U3.42 U6.10 U6.16 U7.10 U7.16 U8.10 U8.16 U9.10 U9.16 U10.10 U10.16 U11.10 U11.16 U12.10 U12.16 U13.10 U13.16 U14.3 U17.2 | length 668.7
  Top Layer w0.2: U3.42@120.51,9.565 122.215,9.565 v1(122.575,9.925) ; 128.038,11.804 128.038,12.183 128.42,12.566 130.366,12.566 131.916,14.116 R4.1@131.916,14.5 ; 128.039,11.777 128.251,11.565 U3.23@129.01,11.565 ; v1(135.925,10.325) 136.891,9.359 U2.48@138.303,9.359 ; C13.1@139.109,22.525 139.109,21.266 v1(139.125,21.25) ; U2.19@146.803,18.859 146.803,19.878 147.734,20.809 C14.1@147.734,21.725 ; U2.13@149.803,15.359 151.291,15.359 v1(151.575,15.075)
  Top Layer w0.3: U6.16@23.649,51.041 23.649,51.571 25.711,53.633 40.898,53.633 43.587,50.944 50.073,50.944 50.073,51.748 51.95,53.625 63.275,53.625 65.817,51.083 75.55,51.083 U8.16@75.592,51.041 75.592,51.698 77.552,53.658 90.092,53.658 92.709,51.041 U9.16@106.199,51.041 106.199,51.698 108.134,53.633 124.892,53.633 127.484,51.041 U10.16@136.171,51.041 136.171,51.671 138.133,53.633 148.717,53.633 150.906,51.444 150.776,51.444 152.965,53.633 167.517,53.633 170.109,51.041 U12.16@175.414,51.041 175.414,51.698 177.441,53.725 187.119,53.725 U13.16@189.257,51.587 ; U13.16@189.257,51.041 U13.16@189.257,51.587 ; U13.10@196.877,51.041 196.877,51.587 196.039,52.425 189.984,52.425 189.257,51.698 U13.16@189.257,51.587
  Top Layer w0.4: R94.2@5.171,23.37 9.116,19.425 10.075,19.425 13.128,16.372 13.128,16.072 18.575,10.625 28.8,10.625 32.069,7.356 55.206,7.356 59.225,11.375 61.55,11.375 v4(63.825,13.65) ; C1.1@119.125,16.425 121.116,18.416 R8.1@122.05,18.416 124.084,18.416 v1@125.975,16.525 ; v1(126,16.5) 128.65,19.15 136.05,19.15 138.166,21.266 v1@139.109,21.266 ; R9.1@168.2,18.391 C15.1@172.825,18.391 ; R101.2@171.926,11.087 173.264,12.425 178.18,12.425 R102.1@179.546,11.059 ; C15.1@172.875,18.341 C15.1@172.825,18.391 ; U14.3@176.525,20.63 175.064,20.63 C15.1@172.825,18.391 ; R106.2@186.957,15.265 R105.2@189.243,15.265 R105.2@189.342,15.166 ; JTAG1.2@187.166,3.439 188.655,1.95 190.619,1.95 C31.2@192.019,3.35 192.069,3.3 192.925,3.3 ; JTAG1.1@187.166,5.979 JTAG1.1@187.42,5.979 ; U17.2@192.937,5.739 192.937,3.312 192.925,3.3 ; R107.2@194.256,3.3 192.925,3.3
  Top Layer w1: U1.4@81.783,17.223 85.768,17.223 L1.2@88.312,19.768 95.219,19.768 C3.1@95.92,19.067 ; R102.1@179.675,11.087 R104.2@184.626,11.087 C28.2@187.166,11.087 ; JTAG1.2@187.166,3.439 JTAG1.1@187.166,5.979 ; JTAG1.1@187.42,5.979 189.071,7.63 189.071,9.804 C28.2@187.825,11.05
  Bottom Layer w0.2: v1(124.925,14.2) 124.925,14.675 126,15.75 v1(126,16.5) 130.05,16.5 v1@131.925,14.625 ; v1(131.925,14.6) 131.925,14.3 v1@135.925,10.3 ; v1(140.2,19.2) 140.2,20.2 139.15,21.25 v1(139.125,21.25) 139.25,21.375 v1@147.725,21.375 ; v1@147.775,7.4 147.952,7.223 147.952,1.725
  Bottom Layer w0.3: v5@31.275,53.625 v3(31.277,51.071) ; v3(57.693,51.071) v5(57.7,53.625) ; v3(83.22,51.071) v5@83.225,53.625 ; v3(113.827,51.071) v1@113.827,53.65 ; v3(143.799,51.071) v1@143.799,53.65 ; v3(158.404,51.071) v5@158.404,53.65 ; v3(183.042,51.071) v2@183.042,53.65
  Bottom Layer w0.4: v4@18.55,10.65 19.55,9.65 19.55,6.95 v4@20.075,6.425 ; v4@63.825,13.625 63.725,13.625 67.325,17.225 v4(80.175,17.225) ; v1@151.675,15 152.925,15 156.35,18.425 v4(168.1,18.425) 167.925,18.25 167.925,11.925 169.1,10.75 v4(171.6,10.75) ; v11(187.475,11.1) 187.475,15.175 v1@187.55,15.25
  Bottom Layer w1: v11@70.65,51.2 70.65,39.25 88.312,21.588 L1.2@88.312,19.768 ; C3.1@95.92,19.067 114.658,19.067 117.475,16.25 119.1,16.25 119.975,15.375 119.975,12.675 125.95,6.7 136.6,6.7 141.575,1.725 147.952,1.725 185.452,1.725 JTAG1.2@187.166,3.439 ; v11(187.475,11.1) 200.95,11.1 209.462,19.612 212.662,19.612 220.2,27.15 220.2,41.075 J2.1@217.95,43.325 ; v1(207.525,20.125) 208.737,18.912
  other v1: 147.875,7.275 187.575,15.225 147.7,21.375 113.825,53.7 143.8,53.7
  other v2: 183.05,53.675
  other v4: 20.05,6.375 18.55,10.675 119.025,16.325
  other v5: 31.275,53.652 158.4,53.75 83.2,53.825
  other v11: 70.7,51.15
pads on no net: D1.0 D4.0 D5.0 D6.0 D7.0 JTAG1.11 JTAG1.17 JTAG1.19 QS1.0 QS1.4 QS1.7 QS1.10 QS2.0 QS2.4 QS2.7 QS2.10 QS3.0 QS3.4 QS3.7 QS3.10 QS4.0 QS4.4 QS4.7 QS4.10 QS5.0 QS5.4 QS5.7 QS5.10 QS6.0 QS6.4 QS6.7 QS6.10 U1.0 U2.1 U2.14 U2.45 U2.52 U2.53 U2.60 U3.20 U3.21 U3.46 U13.4 U13.5 U13.6 U13.7 U13.9 U15.2 U15.4 U15.7 U15.10 U15.12 U15.15 U16.0
copper on no net: | length 0.3
  Top Layer w0.4: 20.101,15.765 20.342,16.006
  other v1: 223.3,11.775 223.225,14.15 223.3,14.175 223.275,16.7 223.225,19.325 223.275,21.85 223.225,24.5 223.275,27 223.3,29.525 223.275,29.6 223.3,32.125 223.275,34.775 223.3,37.275 223.3,39.825 223.3,42.375 223.3,44.975 219.725,46.575 223.3,47.575

## Polygon pours and split planes (outlines as drawn)
GND on Top Layer "Top Layer-No Net" (solid, pour order 1000): 0,54.5 0,0 225.9,0 225.9,54.5
GND on Bottom Layer "Top Layer-No Net" (solid, pour order 1001): 0,54.5 0,0 225.9,0 225.9,54.5

## Keep-outs
Keep-Out Layer:
  lines w0.2: 1.002,33.825 8.85,33.825 ; 225.9,0 0,0 0,54.5 225.9,54.5 225.9,0.025

## Silkscreen, mask and mechanical layers (free items; w line width, h text height)
Top Overlay:
  rectangle: 173.95,6.925 177.575,7.725
  lines w0.1: 0,-4.075 0,-0.075 ; 1.524,-2.583 0,-2.075 ; 1.524,-1.567 0,-2.075 ; 37.175,34.1 37.175,34.425 40.15,37.4 40.15,38.575 41.325,39.75 44.025,39.75 ; 53.8,34.725 53.8,36.3 52.05,38.05 52.05,40.275 54.3,40.275 ; 67.175,33.975 67.175,34.575 67.6,35 69.075,35 69.825,35.75 69.825,38.775 ; 102.706,-2.075 0,-2.075 ; 123.219,-2.075 225.925,-2.075 ; 224.401,-2.583 225.925,-2.075 ; 224.401,-1.567 225.925,-2.075 ; 225.925,-4.075 225.925,-0.075 ; 226.075,0 230.075,0 ; 226.075,54.5 230.075,54.5 ; 227.567,1.524 228.075,0 ; 227.567,52.976 228.075,54.5 ; 228.075,17.882 228.075,0 ; 228.075,36.618 228.075,54.5 ; 228.583,1.524 228.075,0 ; 228.583,52.976 228.075,54.5
  text "Jeehong 2016/5/8" at 7.375,52.55 h1
  text "54.50001 (mm)" at 228.937,18.136 h1.52 r90
  text "GLOW TUBE CLOCK" at 44.925,0.975 h3
  text "225.92505 (mm)" at 102.96,-2.937 h1.52

## Text inside footprints (layer, text, board x,y; h text height)
BT1: Top Overlay "+" at 209.924,11.493 h1 r180
JTAG1: Top Overlay "1" at 189.706,6.487 h1.27 r180; Top Overlay "2" at 189.706,3.947 h1.27 r180
U16: Top Overlay "G+" at 13.901,20.526 h1.02 r180; Top Overlay "G-" at 13.85,18.494 h1.02 r180; Top Overlay "Y+" at 13.799,9.35 h1.02 r180; Top Overlay "Y-" at 13.799,7.013 h1.02 r180